# EAGLE board 01 Raspberry Hat 6 Schematic (EAGLE 8.5.2)
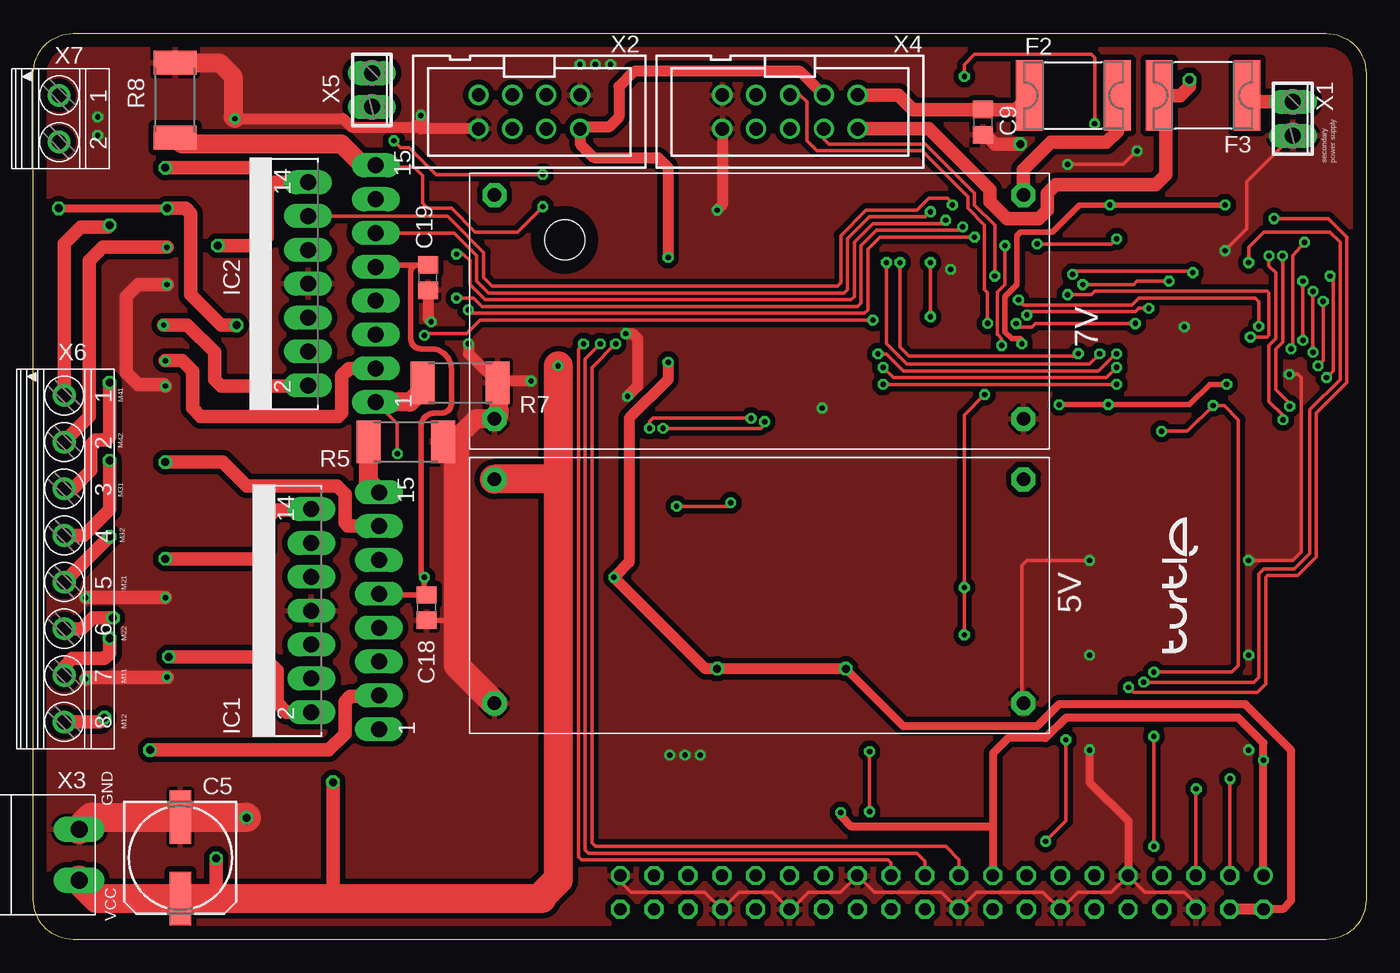
[diagram p0: board, top side]
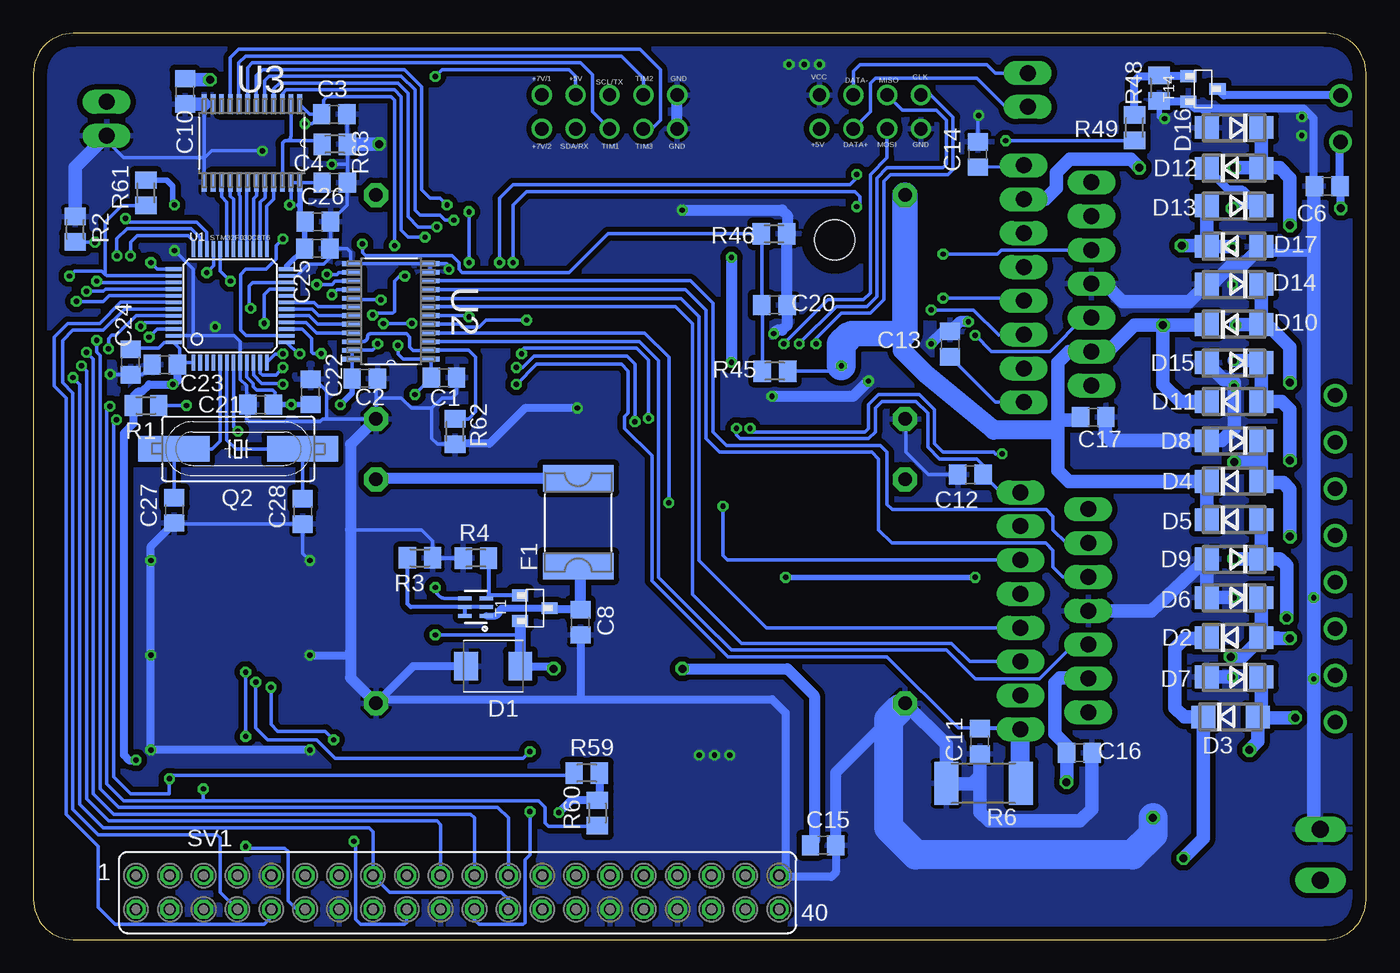
[diagram p1: board, bottom side, seen from below]

Size 100 x 68 mm. Coordinates in mm from the lower left corner, seen from the top.
Outline: 0,65 arc-90 3,68 97,68 arc-90 100,65 100,3 arc-90 97,0 3,0 arc-90 0,3 0,65
Copper layers (1*16): Top 0.035mm / dielectric 1.5mm / Bottom 0.035mm
Design rules "default *": minimum track width 10mil, minimum drill 0.4mm, track to track 8mil, track to pad 8mil, pad to pad 8mil, via to via 8mil, smd to smd 8mil, copper to edge 40mil, drill to drill 8mil, minimum pad ring 10mil, minimum via ring 8mil, stop-mask expansion 4mil, vias tented up to drill 0mil, thermal gap 10mil
Holes 3 mm at 39.87,52.5

## Footprints (pad centres in the part's own frame; a part is rotated, then mirrored left to right if it is on the bottom)
C0805 = smd 1.3 x 1.5: 1 -0.95,0; 2 0.95,0
153CLV-0807 = smd 4 x 1.6: + 3.05,0; - -3.05,0
SMBJ = smd 1.78 x 2.16: A 2.04,0; C -2.03,0
DO214AC = smd 1.8 x 1.7: A 2.05,0; C -2.05,0
2920L = smd 2 x 5.3: 1 -3.3,0; 2 3.3,0
MULTIWATT-15 = drill 1.2 long: 1 -8.89,-7.62; 2 -7.62,-2.54; 3 -6.35,-7.62; 4 -5.08,-2.54; 5 -3.81,-7.62; 6 -2.54,-2.54; 7 -1.27,-7.62; 8 0,-2.54; 9 1.27,-7.62; 10 2.54,-2.54; 11 3.81,-7.62; 12 5.08,-2.54; 13 6.35,-7.62; 14 7.62,-2.54; 15 8.89,-7.62
HC49UP = smd 5.334 x 1.93: 1 -4.826,0; 2 4.826,0
M0805 = smd 1.3 x 1.6: 1 -0.95,0; 2 0.95,0
R2512 = smd 1.8 x 3.2: 1 -2.8,0; 2 2.8,0
FE20-2 = drill 0.914: 1 -24.13,1.27 | drill 0.914 octagon: 2 -24.13,-1.27; 3 -21.59,1.27; 4 -21.59,-1.27; 5 -19.05,1.27; 6 -19.05,-1.27; 7 -16.51,1.27; 8 -16.51,-1.27; 9 -13.97,1.27; 10 -13.97,-1.27; 11 -11.43,1.27; 12 -11.43,-1.27; 13 -8.89,1.27; 14 -8.89,-1.27; 15 -6.35,1.27; 16 -6.35,-1.27; 17 -3.81,1.27; 18 -3.81,-1.27; 19 -1.27,1.27; 20 -1.27,-1.27; 21 1.27,1.27; 22 1.27,-1.27; 23 3.81,1.27; 24 3.81,-1.27; 25 6.35,1.27; 26 6.35,-1.27; 27 8.89,1.27; 28 8.89,-1.27; 29 11.43,1.27; 30 11.43,-1.27; 31 13.97,1.27; 32 13.97,-1.27; 33 16.51,1.27; 34 16.51,-1.27; 35 19.05,1.27; 36 19.05,-1.27; 37 21.59,1.27; 38 21.59,-1.27; 39 24.13,1.27; 40 24.13,-1.27
SOT23 = smd 1.3 x 0.9: 1 -1.1,0.95; 2 -1.1,-0.95; 3 1.1,0
LQFP48 = smd 0.28 x 1.2: 1 -2.75,-4.25; 2 -2.25,-4.25; 3 -1.75,-4.25; 4 -1.25,-4.25; 5 -0.75,-4.25; 6 -0.25,-4.25; 7 0.25,-4.25; 8 0.75,-4.25; 9 1.25,-4.25; 10 1.75,-4.25; 11 2.25,-4.25; 12 2.75,-4.25; 25 2.75,4.25; 26 2.25,4.25; 27 1.75,4.25; 28 1.25,4.25; 29 0.75,4.25; 30 0.25,4.25; 31 -0.25,4.25; 32 -0.75,4.25; 33 -1.25,4.25; 34 -1.75,4.25; 35 -2.25,4.25; 36 -2.75,4.25 | smd 1.2 x 0.28: 13 4.25,-2.75; 14 4.25,-2.25; 15 4.25,-1.75; 16 4.25,-1.25; 17 4.25,-0.75; 18 4.25,-0.25; 19 4.25,0.25; 20 4.25,0.75; 21 4.25,1.25; 22 4.25,1.75; 23 4.25,2.25; 24 4.25,2.75; 37 -4.25,2.75; 38 -4.25,2.25; 39 -4.25,1.75; 40 -4.25,1.25; 41 -4.25,0.75; 42 -4.25,0.25; 43 -4.25,-0.25; 44 -4.25,-0.75; 45 -4.25,-1.25; 46 -4.25,-1.75; 47 -4.25,-2.25; 48 -4.25,-2.75
SOP65P640X120-24N = smd 1.473 x 0.356: 1 -2.921,3.581; 2 -2.921,2.921; 3 -2.921,2.286; 4 -2.921,1.626; 5 -2.921,0.965; 6 -2.921,0.33; 7 -2.921,-0.33; 8 -2.921,-0.965; 9 -2.921,-1.626; 10 -2.921,-2.286; 11 -2.921,-2.921; 12 -2.921,-3.581; 13 2.921,-3.581; 14 2.921,-2.921; 15 2.921,-2.286; 16 2.921,-1.626; 17 2.921,-0.965; 18 2.921,-0.33; 19 2.921,0.33; 20 2.921,0.965; 21 2.921,1.626; 22 2.921,2.286; 23 2.921,2.921; 24 2.921,3.581
LM2596_CONVERTER = drill 1 pad 1.8 octagon: +5V 1.65,41.55; GND 18.45,1.85; GND1 18.45,41.55; IN+ 1.65,1.85
SOT363 = smd 0.3 x 0.99: 1 -0.65,-0.8; 2 0,-0.8; 3 0.65,-0.8; 4 0.65,0.81; 5 0,0.81; 6 -0.65,0.81
2POL254 = drill 1.2 long: 1 -1.27,0; 2 1.27,0
PAK100/2500-10 = drill 1 pad 1.422: 1 -3.81,-1.27; 2 -3.81,1.27; 3 -1.27,-1.27; 4 -1.27,1.27; 5 1.27,-1.27; 6 1.27,1.27; 7 3.81,-1.27; 8 3.81,1.27
MC2 = drill 1.27 long: 1 -1.905,0; 2 1.905,0
PAK100/2500-10' = drill 1 pad 1.422: 1 -5.08,-1.27; 2 -5.08,1.27; 3 -2.54,-1.27; 4 -2.54,1.27; 5 0,-1.27; 6 0,1.27; 7 2.54,-1.27; 8 2.54,1.27; 9 5.08,-1.27; 10 5.08,1.27
1751303 = drill 1.1 pad 1.7: 1 -12.25,-0.1; 2 -8.75,-0.1; 3 -5.25,-0.1; 4 -1.75,-0.1; 5 1.75,-0.1; 6 5.25,-0.1; 7 8.75,-0.1; 8 12.25,-0.1
1751248 = drill 1.1 pad 1.7: 1 -1.75,-0.1; 2 1.75,-0.1

## Placement (x,y rotation side)
C1  100n  [C0805]  69.2,42.16 0 bottom
C2  100n  [C0805]  75.13,42.11 0 bottom
C3  100n  [C0805]  77.42,61.93 0 bottom
C4  100n  [C0805]  77.38,56.81 0 bottom
C5  100u  [153CLV-0807]  11.03,6.13 270 top
C6  4u7  [C0805]  2.92,56.52 180 bottom
C8  100n  [C0805]  58.95,23.81 270 bottom
C9  100n  [C0805]  71.24,61.33 270 top
C10  100n  [C0805]  88.62,63.64 270 bottom
C11  100n  [C0805]  28.99,14.88 270 bottom
C12  100n  [C0805]  29.7,34.89 180 bottom
C13  100n  [C0805]  31.22,44.68 90 bottom
C14  100n  [C0805]  29.14,58.91 90 bottom
C15  100n  [C0805]  40.74,7.07 0 bottom
C16  100n  [C0805]  21.52,14.01 0 bottom
C17  100n  [C0805]  20.48,39.19 0 bottom
C18  100n  [C0805]  29.5,24.9 90 top
C19  100n  [C0805]  29.6,49.67 90 top
C20  47u  [C0805]  44.4,47.62 0 bottom
C21  100n  [C0805]  82.94,40.14 180 bottom
C22  1u  [C0805]  79.21,41.09 90 bottom
C23  100n  [C0805]  90.13,43.14 180 bottom
C24  100n  [C0805]  92.71,43.34 270 bottom
C25  100n  [C0805]  78.7,51.86 0 bottom
C26  4u7  [C0805]  78.66,53.86 0 bottom
C27  20p  [C0805]  89.42,32.21 90 bottom
C28  20p  [C0805]  79.78,32.12 90 bottom
D1  SMBJ5.0A-TR  [SMBJ]  65.49,20.51 180 bottom
D2  SK38SMA  [DO214AC]  9.91,22.64 0 bottom
D3  SK38SMA  [DO214AC]  10.16,16.7 0 bottom
D4  SK38SMA  [DO214AC]  9.91,34.37 0 bottom
D5  SK38SMA  [DO214AC]  9.91,31.49 0 bottom
D6  SK38SMA  [DO214AC]  9.91,25.65 180 bottom
D7  SK38SMA  [DO214AC]  9.91,19.71 180 bottom
D8  SK38SMA  [DO214AC]  9.91,37.43 180 bottom
D9  SK38SMA  [DO214AC]  9.91,28.56 180 bottom
D10  SK38SMA  [DO214AC]  9.91,46.15 0 bottom
D11  SK38SMA  [DO214AC]  9.91,40.36 0 bottom
D12  SK38SMA  [DO214AC]  9.91,57.87 0 bottom
D13  SK38SMA  [DO214AC]  9.91,55.07 180 bottom
D14  SK38SMA  [DO214AC]  9.91,49.18 180 bottom
D15  SK38SMA  [DO214AC]  9.91,43.29 180 bottom
D16  SK38SMA  [DO214AC]  9.91,60.93 180 bottom
D17  SK38SMA  [DO214AC]  9.91,52.01 0 bottom
F1  SL125-33  [2920L]  59.12,31.31 90 bottom
F2  SL125-33  [2920L]  78.03,63.33 0 top
F3  SL125-33  [2920L]  87.77,63.33 180 top
IC1  L298  [MULTIWATT-15]  18.32,24.67 90 top
IC2  L298  [MULTIWATT-15]  18.07,49.2 90 top
Q2  8 MHz  [HC49UP]  84.63,36.82 180 bottom
R1  10k  [M0805]  91.54,40.07 180 bottom
R2  10k  [M0805]  96.85,53.3 270 bottom
R3  10k 1%  [M0805]  70.99,28.64 180 bottom
R4  10k 1%  [M0805]  66.8,28.62 0 bottom
R5  0R25  [R2512]  27.94,37.35 0 top
R6  0R25  [R2512]  28.7,11.71 180 bottom
R7  0R25  [R2512]  32.02,41.78 0 top
R8  0R25  [R2512]  10.64,62.98 90 top
R45  10k  [M0805]  44.36,42.65 0 bottom
R46  1k  [M0805]  44.43,52.96 180 bottom
R48  100k  [M0805]  15.53,63.89 90 bottom
R49  100  [M0805]  17.38,60.92 270 bottom
R59  4k7  [M0805]  58.48,12.49 0 bottom
R60  4k7  [M0805]  57.68,9.49 90 bottom
R61  10k  [M0805]  91.56,56.04 90 bottom
R62  10k  [M0805]  68.36,38.12 270 bottom
R63  10k  [M0805]  77.38,59.67 0 bottom
SV1  [FE20-2]  68.17,3.53 0 bottom
T1  [SOT23]  62.38,24.86 0 bottom
T14  BSS306N  [SOT23]  12.25,63.83 0 bottom
U1  STM32F051C8T  [LQFP48]  85.23,47.56 0 bottom
U2  SN74LVC4245APWR  [SOP65P640X120-24N]  73.16,47.14 180 bottom
U3  SN74LVC4245APWR  [SOP65P640X120-24N]  83.59,59.76 270 bottom
U$2  LM2596_CONVERTER  [LM2596_CONVERTER]  32.74,36.18 270 top
U$3  BCM857BS  [SOT363]  66.81,24.94 90 bottom
U$4  LM2596_CONVERTER  [LM2596_CONVERTER]  32.74,57.52 270 top
X1  [2POL254]  94.49,61.58 270 top
X2  2508-  [PAK100/2500-10]  37.21,62.1 180 top
X3  MC2  [MC2]  3.43,6.35 270 top
X4  2510-  [PAK100/2500-10']  56.77,62.1 180 top
X5  [2POL254]  25.4,63.75 270 top
X6  1751303  [1751303]  2.41,28.57 270 top
X7  1751248  [1751248]  2.03,61.59 270 top

## Library data of the parts
C1-C4 C6 C8-C19 C21-C28 R1-R4 R45 R46 R48 R49 R59-R63 = resistor
C5 = resistor; LINK: http://www.tme.eu/pl/details/sc1e107m0806bvr/kondensatory-elektrolityczne-smd-85c/samwha/
C20 = resistor; LINK: http://www.tme.eu/pl/details/cl21a476mqynnng/kondensatory-mlcc-smd-0805/samsung/
D1 = diode; LINK: http://www.tme.eu/pl/details/smbj5.0a-tr/diody-transil-smd-jednokierunkowe/st-microelectronics/
D2-D17 = diode; LINK: http://www.tme.eu/pl/details/sk38sma-dio/diody-schottky-smd/diotec-semiconductor/sk38sma/
F1 = polyfuse-smd_10; LINK: http://www.tme.eu/pl/details/sl125-33/bezpieczniki-polimerowe-smd/ece/; MF: Littelfuse; MPN: 2920L050; OC_FARNELL: 1822223; OC_NEWARK: 18M4790
F2 F3 = polyfuse-smd_10; LINK: http://www.tme.eu/pl/details/sl075-33/bezpieczniki-polimerowe-smd/ece/; MF: Littelfuse; MPN: 2920L050; OC_FARNELL: 1822223; OC_NEWARK: 18M4790
IC1 IC2 = st-microelectronics; MPN: L298N; OC_FARNELL: 1589425; OC_NEWARK: 32M1527
Q2 = crystal; LINK: YIC 49SLMT 8.00MHZ 20PF 30PPM; OC_FARNELL: unknown; OC_NEWARK: unknown
R5-R8 = rcl; LINK: http://www.tme.eu/pl/details/cs2512-0r25-1%25-hp/rezystory-smd-2512/viking/cs12ftfsr250/
SV1 = con-lsta; OC_FARNELL: unknown; OC_NEWARK: unknown
T1 = we-transistor; LINK: http://www.tme.eu/pl/details/dmp2305u-7/tranzystory-z-kanalem-p-smd/diodes-incorporated/
T14 = we-transistor
U1 = STM32F030; FLASH: 64K
U2 U3 = Texas Instruments_By_element14_Batch_1; MPN: SN74LVC4245APWR; OC_FARNELL: 1470935; OC_NEWARK: 92B8894; PACKAGE: TSSOP-24; SUPPLIER: Texas Instruments
U$2 U$4 = Voltage Converter
U$3 = BCM857BS; LINK: http://www.tme.eu/pl/details/bcm857bs/tranzystory-pnp-smd/nxp/
X1 X5 = con-phoenix-254; OC_FARNELL: unknown; OC_NEWARK: unknown
X2 = Simplex-Connectors; MF: 3M; MPN: 2510-6002UB; OC_FARNELL: 9838244; OC_NEWARK: 46F4725
X3 = con-phoenix-381_l
X4 = con-3m; MF: 3M; MPN: 2510-6002UB; OC_FARNELL: 9838244; OC_NEWARK: 46F4725
X6 X7 = con-phoenix-350; OC_FARNELL: unknown; OC_NEWARK: unknown

## Nets
+3V3: C2.1 C4.1 C21.1 C22.1 C23.1 C24.1 C25.1 C26.1 R1.2 R59.2 R60.2 R61.2 SV1.1 SV1.17 U1.1 U1.9 U1.24 U1.48 U2.23 U2.24 U3.23 U3.24
+5V: C1.1 C3.1 C15.1 C18.2 C19.2 D1.C IC1.9 IC2.9 SV1.2 SV1.4 T1.2 U2.1 U3.1 U$3.4 X2.2 X4.3
+7V/1: C9.1 F2.1 X4.1
+7V/2: C10.1 F3.2 X4.2
BAT_MEAS: C20.1 R45.1 R46.2 U1.14
BOOT0: R2.2 U1.44
DATA+: X2.4 X5.2
DATA-: X2.3 X5.1
EN1: IC1.6 U2.3
EN1_UC: U1.16 U2.21
EN2: IC1.11 U2.4
EN2_UC: U1.17 U2.20
EN3: IC2.6 U2.5
EN3_UC: U1.18 U2.19
EN4: IC2.11 U2.6
EN4_UC: U1.19 U2.18
GND: C1.2 C2.2 C3.2 C4.2 C5.- C6.2 C8.2 C9.2 C10.2 C11.2 C12.2 C13.2 C14.2 C15.2 C16.2 C17.2 C18.1 C19.1 C20.2 C21.2 C22.2 C23.2 C24.2 C25.2 C26.2 C27.1 C28.1 D1.A D6.A D7.A D8.A D9.A D14.A D15.A D16.A D17.A IC1.8 IC2.8 R2.1 R3.1 R4.1 R5.2 R6.2 R7.2 R8.2 R46.1 R48.1 R62.2 R63.2 SV1.6 SV1.9 SV1.14 SV1.20 SV1.25 SV1.30 SV1.34 SV1.39 T14.2 U1.8 U1.23 U1.47 U2.11 U2.12 U2.13 U3.11 U3.12 U3.13 U$2.GND U$2.GND1 U$4.GND U$4.GND1 X1.2 X2.1 X2.8 X3.1 X4.9 X4.10
IN11: IC1.5 U2.7
IN11_UC: U1.45 U2.17
IN12: IC1.7 U2.8
IN12_UC: U1.46 U2.16
IN21: IC1.10 U2.9
IN21_UC: U1.32 U2.15
IN22: IC1.12 U2.10
IN22_UC: U1.33 U2.14
IN31: IC2.5 U3.3
IN31_UC: U1.25 U3.21
IN32: IC2.7 U3.4
IN32_UC: U1.26 U3.20
IN41: IC2.10 U3.5
IN41_UC: U1.27 U3.19
IN42: IC2.12 U3.6
IN42_UC: U1.28 U3.18
LED: R49.2 U1.15
MOT11: D2.A D6.C IC1.2 X6.7
MOT12: D3.A D7.C IC1.3 X6.8
MOT21: D4.A D8.C IC1.13 X6.5
MOT22: D5.A D9.C IC1.14 X6.6
MOT31: D10.A D14.C IC2.2 X6.3
MOT32: D11.A D15.C IC2.3 X6.4
MOT41: D12.A D16.C IC2.13 X6.1
MOT42: D13.A D17.C IC2.14 X6.2
N$1: R62.1 U2.2 U2.22
N$2: R63.1 U3.2 U3.22
N$3: F1.2 U$2.+5V
N$4: C8.1 F1.1 T1.3 U$3.1
N$5: F3.1 X1.1
N$6: R4.2 T1.1 U$3.3
N$8: R3.2 U$3.2 U$3.5 U$3.6
N$10: F2.2 U$4.+5V
N$21: R48.2 R49.1 T14.1
N$24: T14.3 X7.1
N$28: C28.2 Q2.1 U1.6
N$29: C27.2 Q2.2 U1.5
NRST: R1.1 SV1.12 U1.7
RPI_CLK: SV1.23 U1.39 X2.7
RPI_MISO: SV1.21 U1.40 X2.5
RPI_MOSI: SV1.19 U1.41 X2.6
RPI_RXD: SV1.10 U1.42
RPI_TXD: SV1.8 U1.43
SCL: R60.1 SV1.5 U1.35
SCL_TX: U1.21 X4.5
SDA: R59.1 SV1.3 U1.36
SDA_RX: U1.22 X4.4
SEN1: C11.1 IC1.1 R6.1 U1.10
SEN2: C12.1 IC1.15 R5.1 U1.11
SEN3: C13.1 IC2.1 R7.1 U1.12
SEN4: C14.1 IC2.15 R8.1 U1.13
SERVO1: U3.7 X4.6
SERVO1_UC: U1.29 U3.17
SERVO2: U3.8 X4.7
SERVO2_UC: U1.30 U3.16
SERVO3: U3.9 X4.8
SERVO3_UC: U1.31 U3.15
SPI1_NSS: R61.1 SV1.15 SV1.24 U1.38
SWCLK: SV1.22 U1.37
SWDIO: SV1.18 U1.34
VCC: C5.+ C6.1 C16.1 C17.1 D2.C D3.C D4.C D5.C D10.C D11.C D12.C D13.C IC1.4 IC2.4 R45.2 U$2.IN+ U$4.IN+ X3.2 X7.2

## Tracks (layer width: path | path; a pad name or v marks a point on that pad's centre or on a via)
+3V3  (via drill 0.4)
  Top 0.406: v89.41,55.12 v80.77,55.12 78.49,55.12 76.45,53.09 74.04,53.09 73.79,52.83 73.79,49.15 72.9,48.26 72.9,45.59 73.41,45.09 74.04,45.09 74.3,44.83 v74.17,44.7 | v89.53,41.66 88.27,41.66 86.74,40.13 v80.64,40.13 | v80.65,40.14 v80.64,40.13 | v80.64,40.13 v76.96,40.13
  Top 0.61: SV1.17 72.01,4.83 72.01,8.38 | SV1.1 v92.3,13.46 92.3,14.76 90.42,16.64 77.47,16.64 75.95,15.11 73.15,15.11 72.01,13.97 72.01,8.38 | v60.58,9.53 60.58,9.27 61.34,8.51 71.88,8.51 72.01,8.38
  Bottom 0.254: C24.1 92.55,44.4 90.6,44.4 90.19,44.81 U1.48 89.01,44.34 89.01,43.31 | 89.48,43.04 C23.1 89.01,43.31 | U1.1 89.01,43.31 | 79.71,51.8 C25.1 | C2.1 U2.24 U2.23 74.55,44.21 74.3,44.47 v74.17,44.7 | 79.98,56.81 U3.24 | U1.9 83.98,42.2 83.49,41.71 83.49,41.48 83.24,41.22 82.04,41.22 81.86,41.04 C21.1 82.04,40.32 | v80.77,55.12 80.67,55.22 U3.23 80.64,56.81 79.98,56.81 | 79.98,56.81 C4.1
  Bottom 0.305: 80.98,50.53 U1.24
  Bottom 0.406: 80.98,50.53 C25.1 79.65,53.82 C26.1 79.98,54.23 79.98,55.24 | 79.98,56.81 79.98,55.24 | R61.2 90.01,56.99 89.53,56.52 89.53,55.24 v89.41,55.12 | 80.11,55.12 79.98,55.24 | C21.1 v80.65,40.14 | v80.65,40.14 v80.64,40.13 | v89.53,41.66 89.15,42.04 | v76.96,40.13 76.08,41.01 C2.1 | C22.1 v80.65,40.14
  Bottom 0.61: 60.55,9.55 v60.58,9.53 59.66,10.44 R60.2 | v92.3,13.46 92.84,13.46 93.22,13.84 93.22,37.97 92.49,38.7 R1.2 92.49,40.73 92.08,41.15 91.82,41.15 91.31,41.66 v89.53,41.66 89.41,41.66 89.15,41.91 89.15,42.04 89.15,43.11 C23.1 | 57.65,10.41 R60.2 | R59.2 57.53,10.59 R60.2
+5V  (via drill 0.4, 0.6)
  Top 0.254: 29.42,25.94 C18.2 | v69.85,22.86 v69.85,26.42 69.85,39.37 v71.37,40.89 | v72.64,44.58 72.64,45.09 72.39,45.34 72.33,45.4 72.33,48.58 72.9,49.15 v72.9,52.07 | v69.85,64.77 69.85,65.66 70.61,66.42 79.38,66.42 79.63,66.17 v79.63,61.21
  Top 0.406: IC2.9 25.83,50.62 28.83,50.62 | 28.83,50.62 C19.2 | IC1.9 26.02,25.85 C18.2 29.34,26.02 v29.34,27.18 29.08,27.43 29.08,38.48 arc-90 30.1,39.5 30.61,39.5 arc90 31.37,40.26 31.37,42.8 arc90 29.84,44.32 29.08,44.32 arc-90 28.32,45.09 28.32,50.11 arc-90 28.83,50.62
  Top 0.61: SV1.2 92.32,2.29 93.73,2.29 94.36,2.92 94.36,14.22 90.93,17.65 76.96,17.65 75.31,16 65.28,16 v60.96,20.32
  Top 0.813: SV1.2 SV1.4 | v60.96,20.32 v51.31,20.32 50.42,20.32 v43.56,27.18 44.7,28.32 44.7,39.12 47.62,42.04 v47.62,43.31 | v47.62,51.18 47.62,57.91 46.86,58.67 42.04,58.67 41.02,59.69 X2.2 41.15,60.96 43.18,60.96 43.94,61.72 43.94,64.01 45.09,65.15 57.53,65.15 X4.3
  Bottom 0.254: U$3.4 69.02,25.59 arc90 v69.85,26.42 | v69.85,22.86 63.73,22.86 arc90 63.48,22.61 | v71.37,40.89 71.37,40.93 C1.1 70.15,43.47 U2.1 72.26,43.56 72.64,43.94 v72.64,44.58 | v72.9,52.07 72.9,62.99 73.15,63.25 77.98,63.25 78.23,62.99 78.23,62.07 C3.1 | C3.1 79.26,61.93 U3.1 | v69.85,64.77 69.34,65.28 59.82,65.28 59.31,64.77 59.31,63.5 | v79.63,61.21 79.08,61.21 C3.1
  Bottom 0.406: v29.34,27.18 v43.56,27.18
  Bottom 0.61: D1.C 61.15,20.51 v60.96,20.32
  Bottom 0.813: T1.2 63.48,22.61 63.48,20.52 D1.C | v51.31,20.32 43.43,20.32 41.4,18.29 41.4,7.36 C15.1 | v47.62,51.18 v47.62,43.31
+7V/1
  Top 1.016: F2.1 73.67,62.28 C9.1 65.99,62.28 64.9,63.37 X4.1
+7V/2  (via drill 0.6)
  Top 1.016: v86.74,64.52 86.74,64.01 86.07,63.33 F3.2 84.96,62.84 84.96,57.4 84.2,56.64 76.71,56.64 76.07,56.01 76.07,54.74 75.44,54.1 73.03,54.1 71.75,55.37 71.75,56.26 67.18,60.83 X4.2
  Bottom 1.016: v86.74,64.52 88.55,64.52 C10.1
BAT_MEAS  (via drill 0.4)
  Top 0.254: v75.31,52.2 80.9,52.2 v81.28,52.58
  Bottom 0.254: v81.28,52.58 81.79,52.07 81.79,51.05 82.55,50.29 84.07,50.29 84.45,49.91 84.45,45.72 84.04,45.31 U1.14 | v75.31,52.2 75.31,51.56 75.06,51.31 68.58,51.31 68.07,50.8 68.07,50.29 67.82,50.04 59.82,50.04 56.9,52.96 R46.2 45.35,52.93 C20.1 45.31,47.58 R45.1
BOOT0  (via drill 0.4)
  Top 0.254: v95.38,52.32 94.49,51.31 94.49,44.45 v94.36,44.32
  Bottom 0.254: v95.38,52.32 96.82,52.32 arc90 R2.2 | U1.44 92.3,46.81 93.77,45.34 94.11,45.34 94.36,45.09 v94.36,44.32
DATA+
  Bottom 0.254: X5.2 27.05,62.48 29.21,64.64 36.83,64.64 37.21,64.26 37.21,62.1 X2.4
DATA-
  Bottom 0.254: X5.1 27.81,65.02 28.45,65.66 37.97,65.66 38.48,65.15 X2.3
EN1
  Bottom 0.254: IC1.6 21.94,22.13 24.51,19.56 29.34,19.56 31.5,21.72 47.62,21.72 49.78,23.88 50.04,24.13 53.09,27.18 53.09,43.43 54.51,44.86 U2.3
EN1_UC
  Bottom 0.254: U1.16 79.54,46.31 78.76,45.52 U2.21
EN2  (via drill 0.4)
  Top 0.254: v48.26,32.51 52.07,32.51 v52.32,32.77
  Bottom 0.254: v52.32,32.77 52.32,43.69 54.15,45.52 U2.4 | IC1.11 47.91,28.48 48.26,28.83 v48.26,32.51
EN2_UC
  Bottom 0.254: U1.17 79.31,46.81 78.68,46.18 U2.20 | U2.20
EN3  (via drill 0.4)
  Top 0.254: v62.99,46.48 33.53,46.48 32.51,45.47 29.46,45.47 v29.34,45.34
  Bottom 0.254: U2.5 68.02,46.18 67.82,45.97 66.55,45.97 66.04,46.48 v62.99,46.48 | IC2.6 21.2,46.66 23.75,44.12 28.12,44.12 v29.34,45.34
EN3_UC
  Bottom 0.254: U1.18 79.09,47.31 78.61,46.82 U2.19
EN4  (via drill 0.4)
  Top 0.254: v67.31,46.74 v67.31,50.8 | IC2.11 31.57,53.02 33.27,51.31 33.27,49.4 34.16,48.51 60.83,48.51 61.09,48.77 61.09,52.58 62.74,54.23 66.93,54.23 v67.31,54.61
  Bottom 0.254: U2.6 67.39,46.81 v67.31,46.74 | v67.31,54.61 v67.31,50.8
EN4_UC
  Bottom 0.254: U1.19 78.92,47.81 78.61,47.5 76.11,47.5 U2.18
GND  (via drill 0.4, 0.6)
  Top 0.254: 31.42,27.51 31.75,27.18 | SV1.6 87.22,2.7 86.36,3.56 83.38,3.56 SV1.9 80.89,3.56 78.36,3.56 SV1.14 75.76,3.56 70.74,3.56 SV1.20 68.14,3.56 63.12,3.56 61.88,4.8 SV1.25 60.57,3.56 58.17,3.56 56.87,2.26 SV1.30 55.44,3.56 52.96,3.56 SV1.34 50.36,3.56 44.83,3.56 44.04,4.35 SV1.39 | v79.25,28.45 74.55,28.45 74.17,28.07 74.17,17.85 U$2.GND1 | v94.23,42.42 94.87,42.42 95.12,42.16 95.12,29.08 94.49,28.45 v91.19,28.45 | v89.41,51.69 91.06,53.34 91.06,56.88 X1.2 | v77.6,58.17 81.79,58.17 v82.8,59.18
  Top 0.406: C18.1 31.57,23.95 31.75,24.13 | 34.94,41.91 R7.2
  Top 0.61: v79.25,14.22 79.25,11.81 82.17,8.89 82.17,4.83 SV1.9
  Top 0.813: X2.8 29.08,60.83 29.08,61.34 | v29.08,61.85 29.08,61.34 | C19.1 29.6,46.6 v29.84,46.35 | v32.64,44.7 32.64,43.97 R7.2 | v44.45,45.47 44.96,45.47 45.34,45.09 45.34,41.53 v44.58,40.77 | v37.34,41.91 34.94,41.91 | X4.10 51.69,55.12 v51.31,54.74 | v15.11,61.59 23.24,61.59 23.88,60.96 28.7,60.96 29.08,61.34
  Top 1.016: v10.03,49.15 7.87,49.15 6.99,48.26 6.99,42.55 7.87,41.66 9.78,41.66 v9.91,41.53 | v9.91,25.65 v3.94,25.65 | v10.03,19.68 4.06,19.68 v3.94,19.56 | C9.2 71.45,60.38 72.14,59.69 v74.04,59.69
  Top 1.422: R7.2 34.95,39.42 U$4.GND 33.21,39.07 31.5,37.35 | R5.2 31.37,37.35 | 31.37,37.35 31.5,37.35 | 31.5,37.35 31.99,37.35 | R8.2 13.97,65.78 14.99,64.77 14.99,61.72 v15.11,61.59 | 31.75,37.34 31.38,37.34 31.37,37.35
  Top 1.93: 31.75,37.34 31.75,27.18 31.75,24.13 31.75,20.57 U$2.GND
  Top 2.184: X3.1 4.36,9.18 C5.- 15.96,9.18 v16,9.14
  Bottom 0.254: 84,40.58 C21.2 | C25.2 76.46,51.86 76.2,51.6 76.2,50.84 U2.13 U2.12 | U1.23 80.19,49.81 79.33,50.67 78.23,50.67 77.75,51.16 C25.2 | 77.8,51.81 C25.2 | C25.2 77.71,51.9 C26.2 76.45,55.12 76.45,56.79 C4.2 76.43,58.17 | 84,40.58 84,39.04 83.82,38.86 78.49,38.86 78.28,39.07 77.98,39.07 | C22.2 79.07,41.66 78.49,41.66 77.98,41.15 77.98,39.07 | 84,40.58 84,41.55 84.48,42.03 U1.8 84.48,44.85 84.93,45.31 88.01,45.31 | 87.17,58.62 U3.12 U3.11 | 76.43,58.17 R63.2 76.47,59.7 C3.2 | 77.98,39.07 U$4.GND1 74.29,40.64 | 74.29,40.64 74.29,42 C2.2 | C1.2 68.25,40.97 68.58,40.64 69.34,40.64 70.1,39.88 | R62.2 69.68,37.17 70.1,37.59 70.1,39.88 | U2.12 U2.11 | C23.2 91.83,42.39 C24.2 94.2,42.39 v94.23,42.42 | U1.47 88.01,45.31 | C27.1 89.33,31.17 C28.1 79.78,28.98 v79.25,28.45 | R3.1 70.04,29.91 70.87,30.73 76.2,30.73 | 74.29,40.64 72.39,40.64 71.63,39.88 70.1,39.88 | U3.13 87.17,58.55 | 87.17,58.55 87.17,58.62 | 87.17,58.62 86.61,59.18 v82.8,59.18 | U2.12 69.01,50.72 68.83,50.55 v68.83,50.29 | X1.2 94.49,59.95 93.22,58.67 87.3,58.67 87.17,58.55 | v89.41,51.69 88.01,50.29 88.01,45.31 | 43.48,47.65 C20.2 | 76.43,58.17 v77.6,58.17 | C12.2 32.86,34.89 34.54,36.58 34.54,39.02 U$4.GND | 43.48,51.18 R46.1 43.43,53 | C14.2 29.14,61.8 v29.08,61.85 | 44.01,4.83 SV1.39 43.94,4.7
  Bottom 0.305: R3.1 67.77,28.64 R4.1
  Bottom 0.406: R48.1 15.53,61.76 v15.11,61.59 | C13.2 31.71,45.63
  Bottom 0.61: C27.1 91.19,29.5 v91.19,28.45 v91.19,21.34 v91.19,14.22 v79.25,14.22 | v79.25,21.34 76.45,21.34 76.2,21.59 | D1.A 71.52,20.51 U$2.GND1 73.99,18.03 59.05,18.03 | C8.2 58.95,18.14 59.05,18.03 | v59.18,39.88 63.12,39.88 65.79,37.21 68.32,37.21 R62.2 | D17.A 7.42,51.56 3.94,51.56 | C6.2 3.94,56.45 3.94,61.59 4.7,62.36 12.32,62.36 | R48.1 15.47,62.88 T14.2 12.82,62.36 12.32,62.36 | D16.A 11.96,62 12.32,62.36 | 59.05,18.03 44.58,18.03 43.56,17.02 43.56,5.21 44.07,4.7 | C15.2 39.79,5.04 40.13,4.7 43.94,4.7
  Bottom 0.813: C15.2 39.79,12.53 34.99,17.33 U$2.GND | U$2.GND1 76.2,19.64 76.2,21.59 76.2,30.73 76.2,37.16 U$4.GND1 | R46.1 43.48,47.65 | X4.10 X4.9 | C20.2 43.45,46.09 43.81,45.72 44.2,45.72 v44.45,45.47 | v44.58,40.77 38.48,40.77 v37.34,41.91 | v29.84,46.35 30.5,46.35 C13.2 | 31.71,45.63 v32.64,44.7 | v51.31,54.74 43.81,54.74 43.43,54.36 43.43,53
  Bottom 1.016: D17.A 9.2,50.67 10.03,50.67 11.53,49.18 D14.A 13.26,47.88 18.29,47.88 19.61,49.2 IC2.8 | D15.A 10.71,42.04 10.16,42.04 9.91,41.78 v9.91,41.53 9.91,38.35 10.83,37.43 D8.A 19.14,37.43 19.56,37.85 19.56,39.16 C17.2 19.44,39.1 | 20.95,24.64 16.14,24.64 D9.A D6.A v9.91,25.65 | D7.A 10.06,19.71 v10.03,19.68 | U$2.GND 31.5,14.65 R6.2 31.48,11.68 29.59,11.68 28.99,12.28 C11.2 28.99,9.56 28.32,8.89 21.46,8.89 20.57,9.78 C16.2 | X3.1 3.94,8.76 v3.94,19.56 v3.94,25.65 3.94,51.56 3.94,56.45 | C10.2 U3.12 | R2.1 96.85,57.96 X1.2 | v74.04,59.69 76.28,59.69 R63.2
  Bottom 2.184: v16,9.14 16,7.87 17.53,6.35 33.78,6.35 35.81,8.38 35.81,16.51 34.99,17.33
  other vias: 4.83,61.72 4.83,60.33 43.31,65.66 42.16,65.66 41.02,65.66 86.36,45.97 50.04,13.84 48.9,13.84 47.75,13.84
  pour Bottom (isolate 0.406): 0,63 0,65 arc-90 3,68 97,68 arc-90 100,65 100,3 arc-90 97,0 3,0 arc-90 0,3
  pour Top (isolate 0.406): 0,3 0,65 arc-90 3,68 97,68 arc-90 100,65 100,3 arc-90 97,0 3,0 arc-90
IN11
  Bottom 0.254: U2.7 70.21,47.5 51.82,47.5 50.55,46.23 50.55,25.91 46.86,22.23 31.11,22.23 29.75,20.86 IC1.5
IN11_UC  (via drill 0.4)
  Top 0.254: v73.91,48.01 74.3,47.62 82.42,47.62 82.93,48.13 91.69,48.13 91.95,47.88 v91.94,46.02
  Bottom 0.254: v73.91,48.01 75.98,48.01 U2.17 | U1.45 91.66,46.31 v91.94,46.02
IN12
  Bottom 0.254: U2.8 51.41,48.11 50.04,46.74 50.04,28.45 44.99,23.4 IC1.7
IN12_UC  (via drill 0.4)
  Top 0.254: v91.31,45.21 92.58,45.21 92.71,45.34 92.71,48.51 92.58,48.64 79.63,48.64 79.38,48.39 v77.6,48.39
  Bottom 0.254: U1.46 90.72,45.81 v91.31,45.21 | v77.6,48.39 77.22,48.77 U2.16 | U2.16
IN21
  Bottom 0.254: IC1.10 22.76,27.21 23.5,27.94 23.5,29.21 24.03,29.74 35.59,29.74 36.58,30.73 36.58,36.07 37.08,36.58 48.51,36.58 48.77,36.83 49.53,37.59 49.53,47.24 51.05,48.77 U2.9
IN21_UC  (via drill 0.4)
  Top 0.254: v78.74,49.15 82.55,49.15 82.8,49.4 v85.22,49.4
  Bottom 0.254: U1.32 85.98,50.16 v85.22,49.4 | U2.15 76.11,49.4 77.34,49.4 77.6,49.15 v78.74,49.15
IN22
  Bottom 0.254: IC1.12 22.51,29.75 23.5,30.73 23.5,31.75 24,32.26 35.56,32.26 35.94,32.64 35.94,36.58 36.45,37.08 48.01,37.08 49.02,38.1 49.02,47.75 50.7,49.43 U2.10
IN22_UC  (via drill 0.4)
  Top 0.254: 78.11,50.04 v77.98,49.91 78.23,50.16 86.87,50.16 v87,50.04
  Bottom 0.254: U1.33 86.48,50.55 v87,50.04 | v77.98,49.91 77.22,49.91 77.09,50.04 76.11,50.04 U2.14
IN31  (via drill 0.4)
  Top 0.254: v70.61,52.7 63.5,52.7 62.61,51.82 62.61,47.24 62.36,46.99 32.89,46.99 v32.64,47.24
  Bottom 0.254: U3.3 81.31,63.47 81.03,63.75 72.9,63.75 72.39,63.25 72.39,53.21 71.88,52.7 v70.61,52.7 | v32.64,47.24 29.46,47.24 27.56,45.34 25.74,45.34 IC2.5
IN31_UC
  Bottom 0.254: U1.25 82.48,55.04 81.96,55.56 U3.21
IN32  (via drill 0.4)
  Top 0.254: v31.75,48.13 33.02,48.13 33.66,47.5 61.85,47.5 62.1,47.75 62.1,52.07 63.25,53.21 69.47,53.21 v69.72,53.47
  Bottom 0.254: U3.4 81.97,63.83 81.53,64.26 72.64,64.26 71.88,63.5 71.88,54.23 71.12,53.47 v69.72,53.47 | v31.75,48.13 25.88,48.13 IC2.7
IN32_UC
  Bottom 0.254: U1.26 82.98,55.32 82.62,55.68 U3.20
IN41  (via drill 0.4)
  Top 0.254: v31.75,51.44 32.26,51.44 32.77,50.93 32.77,49.15 33.91,48.01 61.34,48.01 61.59,48.26 61.59,52.32 62.99,53.72 68.2,53.72 v68.45,53.98
  Bottom 0.254: U3.5 82.63,64.44 82.3,64.77 72.39,64.77 71.37,63.75 71.37,54.74 70.99,54.36 69.47,54.36 69.09,53.98 v68.45,53.98 | IC2.10 27.36,51.74 27.67,51.44 v31.75,51.44
IN41_UC
  Bottom 0.254: U1.27 83.48,55.6 83.26,55.82 U3.19
IN42  (via drill 0.4)
  Top 0.254: v68.96,55.12 68.96,55.24 68.58,55.63 67.18,55.63 66.29,54.74 62.48,54.74 60.58,52.83 60.58,49.28 60.33,49.02 34.42,49.02 33.78,49.66 33.78,51.56 31.56,53.78 31.11,54.23 31.06,54.28 IC2.12
  Bottom 0.254: U3.6 83.26,64.82 82.8,65.28 72.14,65.28 70.87,64.01 70.87,56.26 70.23,55.63 69.47,55.63 v68.96,55.12
IN42_UC
  Bottom 0.254: U1.28 83.98,56.78 U3.18
LED  (via drill 0.4)
  Top 0.254: v65.02,50.8 65.02,44.45 65.68,43.79 78.22,43.79 v78.4,43.97 | v38.23,57.4 30.23,57.4 28.19,59.44 27.56,59.44 v27.05,59.94
  Bottom 0.254: v65.02,50.8 65.02,55.63 64.01,56.64 38.73,56.64 38.23,57.15 v38.23,57.4 | U1.15 79.84,45.81 79.12,45.09 79.12,44.07 79.02,43.97 v78.4,43.97 | v27.05,59.94 17.41,59.94 R49.2
MOT11  (via drill 0.6)
  Top 1.016: v5.72,22.6 v5.71,22.61 5.71,21.46 5.33,21.08 2.92,21.08 2.31,20.47 X6.7 | IC1.2 19.02,17.05 18.29,17.78 18.29,20.19 17.27,21.21 v10.16,21.21
  Bottom 1.016: D6.C D2.A | D2.A 7.24,22.64 | 7.24,22.64 6.62,22.64 | v5.71,22.61 7.2,22.61 7.24,22.64 | v10.16,21.21 9.29,21.21 D2.A
MOT12  (via drill 0.6)
  Top 1.016: IC1.3 25.86,18.24 23.77,18.24 23.38,17.84 23.38,15.44 22.16,14.22 v8.76,14.22 | X6.8 5.02,16.32 v5.33,16.64
  Bottom 1.016: D7.C 7.86,16.95 D3.A | v5.33,16.64 8.05,16.64 D3.A | D3.A 8.12,14.87 v8.76,14.22
MOT21  (via drill 0.6)
  Top 1.016: IC1.13 25.91,31.04 23.57,31.04 23.38,31.24 23.38,33.44 22.77,34.04 15.99,34.04 14.22,35.81 v9.91,35.81 | X6.5 3.05,27.56 v5.71,30.23
  Bottom 1.016: D8.C 7.86,35.81 | 7.86,35.81 D4.A 7.78,34.29 6.22,34.29 5.71,33.78 v5.71,30.23 | v9.91,35.81 7.86,35.81
MOT22  (via drill 0.6)
  Top 1.016: IC1.14 20.82,32.24 18.18,32.24 17.38,31.44 17.38,29.31 16.64,28.57 v9.91,28.57 | X6.6 3.64,23.32 4.45,24.13 v5.97,24.13
  Bottom 1.016: D9.C D5.A | D9.C 7.4,28.56 | v9.91,28.57 7.88,28.57 D9.C | v5.97,24.13 5.97,28.07 6.48,28.57 7.84,28.57 D9.C
MOT31  (via drill 0.4, 0.6)
  Top 1.016: X6.3 2.96,33.83 4.32,35.18 4.32,37.08 4.7,37.47 5.46,37.47 5.71,37.72 v5.71,41.78 | v9.78,46.1 11.56,46.1 13.59,44.07 13.59,42.04 14.1,41.53 20.55,41.53 IC2.2
  Bottom 1.016: D14.C D10.A | D10.A 7.41,46.15 5.71,44.45 v5.71,41.78 | D10.A 9.73,46.15 v9.78,46.1
MOT32  (via drill 0.4, 0.6)
  Top 1.016: IC2.3 23.68,42.85 23.14,42.3 23.14,39.51 22.86,39.24 12.57,39.24 11.94,39.88 11.94,42.67 11.18,43.43 v9.91,43.43 | X6.4 3.78,30.32 5.71,32.26 v5.71,35.94
  Bottom 1.016: v9.91,43.43 8,43.43 D15.C D11.A 7.83,40.39 6.35,40.39 5.71,39.75 v5.71,35.94
MOT41  (via drill 0.6)
  Top 1.016: X6.1 2.31,52.22 3.56,53.47 5.59,53.47 v5.71,53.59 | v17.02,57.91 v9.91,57.91
  Bottom 1.016: IC2.13 24.07,55.55 23.24,56.39 23.24,57.53 22.23,58.55 17.65,58.55 v17.02,57.91 | D12.A D16.C | D12.A 7.32,57.87 7.28,57.91 6.48,57.91 5.71,57.15 v5.71,53.59 | v9.91,57.91 7.9,57.91 D12.A
MOT42  (via drill 0.4, 0.6)
  Top 1.016: IC2.14 18.09,56.83 17.53,56.26 17.53,52.7 16.89,52.07 v13.84,52.07 | X6.2 2.31,37.37 4.19,39.24 4.19,50.93 5.21,51.94 v10.03,51.94
  Bottom 1.016: D17.C D13.A 11.91,55.12 | D17.C 10.1,52.01 v10.03,51.94 | D17.C 12.26,52.01 12.32,52.07 v13.84,52.07
N$1
  Bottom 0.254: R62.1 67.35,39.07 66.8,39.62 66.8,43.69 67.33,44.22 U2.2 70.26,44.2 71.5,44.2 71.75,44.45 71.75,45.21 72.01,45.47 74.68,45.47 arc-90 74.93,45.21 arc90 75.29,44.86 U2.22
N$2
  Bottom 0.254: U3.2 80.67,60.3 arc90 81.03,59.94 | 81.03,59.94 arc-90 81.31,59.66 U3.22 | R63.1 arc-90 78.74,59.94 81.03,59.94
N$3
  Bottom 0.813: F1.2 74.21,34.61 U$2.+5V
N$4
  Bottom 0.508: U$3.1 65.37,24.29 arc-90 65.02,24.64 arc90 64.8,24.86 T1.3
  Bottom 0.61: C8.1 61.17,24.76 T1.3
  Bottom 0.813: C8.1 58.95,27.84 F1.1
N$5
  Top 1.016: X1.1 91.55,62.85 F3.1
N$6
  Bottom 0.305: R4.2 65.85,25.76 U$3.3 65.79,25.81 T1.1
N$8
  Bottom 0.305: U$3.2 U$3.5 | U$3.6 U$3.5 | R3.2 71.94,25.21 71.68,24.94 U$3.5
N$10
  Top 1.016: F2.2 81.33,60.63 80.52,59.82 76.33,59.82 74.3,57.78 U$4.+5V
N$21
  Bottom 0.61: T14.1 15.47,64.78 R48.2 15.59,64.77 17.02,64.77 17.38,64.41 R49.1
N$24
  Bottom 0.61: X7.1 10.66,63.34 T14.3
N$28
  Bottom 0.254: U1.6 85.48,37.48 84.8,36.8 79.82,36.8 Q2.1 79.78,36.8 C28.2
N$29
  Bottom 0.254: U1.5 85.98,37.42 86.6,36.8 89.43,36.8 Q2.2 89.42,36.79 C27.2
NRST  (via drill 0.4)
  Top 0.254: v84.07,6.99 v84.07,15.24 | v84.07,20.07 89.92,20.07 90.42,20.57 90.42,39 89.35,40.07 v88.52,40.07 | v88.52,40.07 | v84.65,38.14 86.59,38.14 v88.52,40.07
  Bottom 0.254: SV1.12 80.24,2.26 80.9,2.92 80.9,6.6 81.15,6.86 83.95,6.86 v84.07,6.99 | v84.07,15.24 v84.07,20.07 | v88.52,40.07 R1.1 | U1.7 84.98,38.47 v84.65,38.14
RPI_CLK  (via drill 0.4)
  Top 0.254: v95.25,44.96 v95.25,49.4 | SV1.23 64.36,5.75 64.14,5.97 41.15,5.97 40.89,6.22 40.89,44.32 v41.27,44.7
  Bottom 0.254: v95.25,44.96 95.25,44.07 95,43.81 95,11.3 93.6,9.91 65.15,9.91 64.36,9.11 SV1.23 | U1.39 95.22,49.31 v95.25,49.4 | v41.27,44.7 41.27,45.09 39.37,46.99 37.21,46.99 36.2,48.01 36.2,56.9 35.69,57.4 31.37,57.4 30.99,57.78 30.99,61.72 32.64,63.37 X2.7
RPI_MISO  (via drill 0.4)
  Top 0.254: v96.01,44.07 v96.01,48.64 | SV1.21 66.9,5.87 66.29,6.48 41.66,6.48 41.4,6.73 41.4,43.56 v42.55,44.7
  Bottom 0.254: v96.01,44.07 95.5,43.56 95.5,10.92 93.98,9.4 67.18,9.4 66.9,9.11 SV1.21 | U1.40 94.58,48.81 94.74,48.64 v96.01,48.64 | v42.55,44.7 39.75,47.5 37.47,47.5 36.7,48.26 36.7,57.15 35.94,57.91 31.75,57.91 31.5,58.17 31.5,61.47 32.26,62.23 34.8,62.23 X2.5
RPI_MOSI  (via drill 0.4)
  Top 0.254: v96.39,43.05 96.77,43.43 v96.77,47.88 | SV1.19 69.44,6 68.45,6.99 42.16,6.99 41.91,7.24 41.91,42.93 v43.69,44.7
  Bottom 0.254: v96.39,43.05 96.01,42.67 96.01,10.54 94.36,8.89 69.72,8.89 69.44,8.61 SV1.19 | v96.77,47.88 94.74,47.88 94.31,48.31 U1.41 | X2.6 35.94,58.67 37.21,57.4 37.21,48.51 37.72,48.01 40.39,48.01 v43.69,44.7
RPI_RXD
  Bottom 0.254: SV1.10 82.14,1.68 82.68,1.14 93.85,1.14 95.12,2.41 95.12,6.99 97.54,9.4 97.54,40.64 98.42,41.53 98.42,45.21 97.41,46.23 95.03,46.23 93.45,47.81 U1.42
RPI_TXD
  Bottom 0.254: SV1.8 85.98,3.56 85.98,7.62 86.23,7.87 95.12,7.87 97.03,9.78 97.03,41.02 97.79,41.78 97.79,44.96 97.03,45.72 94.74,45.72 93.15,47.31 U1.43
SCL  (via drill 0.4)
  Top 0.254: v94.26,40.01 94.26,40.23 93.22,41.27 93.22,44.32 93.73,44.83 v93.73,51.31 | SV1.5 87.22,11.27 v87.25,11.3
  Bottom 0.254: 87.12,10.41 62.1,10.41 61.59,9.91 61.59,8.76 61.34,8.51 57.71,8.51 R60.1 | 87.12,10.41 93.22,10.41 94.49,11.68 94.49,39.78 v94.26,40.01 | v93.73,51.31 93.73,52.58 92.96,53.34 88.14,53.34 87.48,52.68 U1.35 | v87.25,11.3 87.25,10.54 87.12,10.41
SCL_TX  (via drill 0.4)
  Top 0.254: v82.68,46.23 75.18,46.23 74.93,45.97 73.91,45.97 73.74,46.15 v73.74,46.22 | X4.5 57.53,63.37 58.04,62.87 58.04,59.94 58.8,59.18 66.67,59.18 70.1,55.75 70.1,54.86 71.37,53.59 71.37,48.77 71.6,48.54 v71.6,46.23
  Bottom 0.254: U1.21 82.26,48.81 82.68,48.39 v82.68,46.23 | v71.6,46.23 73.73,46.23 v73.74,46.22
SDA  (via drill 0.4)
  Top 0.254: SV1.3 89.76,12.03 v89.79,12.06 | v93.75,38.99 93.75,39.34 92.71,40.39 92.71,44.58 93.22,45.09 93.22,50.04 92.71,50.55 v92.71,51.31
  Bottom 0.254: v92.71,51.31 92.71,52.32 92.2,52.83 88.39,52.83 87.98,52.42 U1.36 | v93.75,38.99 93.98,38.77 93.98,12.19 92.71,10.92 89.79,10.92 v89.79,12.06 89.53,12.32 59.6,12.32 R59.1
SDA_RX  (via drill 0.4)
  Top 0.254: v83.69,47.37 82.93,47.37 82.68,47.12 74.8,47.12 v74.55,46.86 | v72.14,49.78 72.14,53.59 70.61,55.12 70.61,56.01 66.93,59.69 59.69,59.69 59.31,60.07 X4.4
  Bottom 0.254: U1.22 83.53,49.31 83.82,49.02 83.82,47.5 v83.69,47.37 | v72.14,49.78 72.52,49.78 72.9,49.4 72.9,47.12 73.03,46.99 74.42,46.99 v74.55,46.86
SEN1  (via drill 0.4)
  Top 0.254: 81.03,41.66 v81.28,41.66 v63.75,41.66
  Bottom 0.254: U1.10 83.48,42.35 82.86,41.73 81.36,41.73 v81.28,41.66 | v63.75,41.66 62.23,43.18 55.88,43.18 55.37,42.67 55.37,39.5 55.63,39.24 55.63,38.35 53.59,36.32 53.59,26.92 47.88,21.21 35.94,21.21 30.61,15.88 29.03,15.88 C11.1
  Bottom 0.305: IC1.1 25.99,15.83 C11.1
  Bottom 1.422: R6.1 25.94,11.75 IC1.1
SEN2  (via drill 0.4)
  Top 0.254: v47.24,38.35 54.61,38.35 54.86,38.61 v54.86,38.86 | v63.75,42.93 64.52,42.16 80.52,42.16 v81.28,42.93
  Top 1.422: IC1.15 25.14,34.35 R5.1
  Bottom 0.254: IC1.15 27.41,33.56 C12.1 28.49,35.35 29.21,36.07 32,36.07 32.89,36.96 32.89,39.5 33.78,40.39 36.32,40.39 36.83,39.88 36.83,38.1 37.34,37.59 46.99,37.59 47.24,37.85 v47.24,38.35 | v54.86,38.86 54.86,43.18 55.47,43.79 62.43,43.79 63.3,42.93 v63.75,42.93 | U1.11 82.98,42.52 82.8,42.34 81.79,42.34 v81.28,42.93
SEN3  (via drill 0.4)
  Top 0.254: 25.73,40.31 27.3,38.73 v27.3,36.45 | v46.23,38.35 46.23,38.86 46.48,39.12 v53.85,39.12 | v63.37,43.94 64.01,43.94 65.28,42.67 79.92,42.67 81.19,43.94 v81.28,43.94
  Top 0.305: IC2.1 25.73,40.31
  Top 1.422: IC2.1 28.26,40.31 29.22,41.28 R7.1
  Bottom 0.254: v27.3,36.45 27.81,36.45 27.94,36.58 31.75,36.58 32.38,37.21 32.38,39.75 33.53,40.89 36.58,40.89 37.34,40.13 37.34,38.35 37.59,38.1 45.97,38.1 | v53.85,39.12 53.85,43.48 54.74,44.37 63.2,44.37 63.37,44.2 v63.37,43.94 | v81.28,43.94 81.84,43.94 U1.12 | IC2.1 27.81,40.31 C13.1
  Bottom 0.305: 45.97,38.1 v46.23,38.35
SEN4  (via drill 0.4)
  Top 0.254: v64.01,50.8 64.01,44.7 65.53,43.18 79.25,43.18 v80.01,43.94 | IC2.15 25.82,57.96 28.57,57.96 29.21,57.32 29.21,55.24 29.59,54.86 31.37,54.86 33.15,53.09 36.32,53.09 v38.23,54.99
  Top 1.422: IC2.15 24.71,58.09 23.11,59.69 11.14,59.69 R8.1
  Bottom 0.254: v64.01,50.8 64.01,55.12 62.99,56.13 38.35,56.13 37.97,55.75 37.97,55.24 v38.23,54.99 | v80.01,43.94 80.11,43.94 U1.13 | C14.1 25.8,57.98 IC2.15
SERVO1
  Bottom 0.254: U3.7 83.92,65.43 83.57,65.79 58.93,65.79 58.04,64.9 58.04,62.1 X4.6
SERVO1_UC
  Bottom 0.254: U1.29 84.48,55.8 84.56,55.88 U3.17
SERVO2
  Bottom 0.254: U3.8 84.58,62.7 84.58,65.79 84.07,66.29 55.88,66.29 54.23,64.64 X4.7
SERVO2_UC
  Bottom 0.254: U1.30 84.98,55.56 85.22,55.8 U3.16 | U3.16
SERVO3
  Bottom 0.254: U3.9 85.22,66.16 84.58,66.8 54.48,66.8 52.96,65.28 52.96,61.47 53.59,60.83 X4.8
SERVO3_UC
  Bottom 0.254: U1.31 85.48,55.34 85.88,55.74 U3.15
SPI1_NSS  (via drill 0.4)
  Top 0.254: v97.28,49.78 97.54,49.53 97.54,42.67 v97.03,42.16
  Bottom 0.254: SV1.24 64.36,3.02 64.9,3.56 73.27,3.56 SV1.15 74.52,8.1 74.8,8.38 94.74,8.38 96.52,10.16 96.52,41.66 v97.03,42.16 | v97.28,49.78 96.9,50.16 94.87,50.16 94.61,49.91 | U1.38 94.51,49.81 94.61,49.91 | R61.1 93.38,55.09 94.61,53.85 94.61,49.91
SWCLK  (via drill 0.4)
  Top 0.254: v91.19,50.8 91.19,51.94 92.33,53.09 97.28,53.09 98.04,52.32 98.04,42.04 95.76,39.75 95.76,28.96 94.61,27.81 92.33,27.81 91.95,27.43 91.95,19.68 91.57,19.3 v83.31,19.3 | v62.74,14.1 v62.74,9.59
  Bottom 0.254: U1.37 90.69,50.31 v91.19,50.8 | v83.31,19.3 83.31,15.88 82.42,14.99 78.74,14.99 77.34,13.59 63.25,13.59 v62.74,14.1 | v62.74,9.59 62.74,6.35 63.12,5.97 63.12,1.27 63.25,1.14 66.55,1.14 66.93,1.52 66.93,2.23 SV1.22
SWDIO  (via drill 0.4)
  Top 0.254: v82.17,18.92 82.55,18.54 91.82,18.54 92.46,19.18 92.46,27.18 92.58,27.3 94.87,27.3 96.27,28.7 96.27,39.5 98.55,41.78 98.55,52.7 97.16,54.1 v93.09,54.1 | v77.47,14.99 77.47,8.89 v75.95,7.37
  Bottom 0.254: U1.34 86.98,53.07 87.76,53.85 92.84,53.85 v93.09,54.1 | v82.17,18.92 82.17,16.13 81.66,15.62 78.11,15.62 v77.47,14.99 | v75.95,7.37 75.82,7.24 75.82,1.52 75.44,1.14 72.14,1.14 72.01,1.27 72.01,2.23 SV1.18
VCC  (via drill 0.4, 0.6)
  Top 0.61: v1.91,54.86 v10.03,54.86
  Top 1.016: v22.48,11.81 22.48,3.17 22.35,3.05 11.07,3.05 C5.+ | v13.72,6.1 13.72,3.34 13.97,3.08 | v10.03,54.86 11.43,54.86 11.81,54.48 11.81,48.39 14.1,46.1 v15.24,46.1
  Top 2.184: X3.2 4.79,3.08 C5.+ 13.97,3.08 37.97,3.08 | 37.97,3.08 38.13,3.08 | v39.37,43.05 39.37,34.67 | 39.37,34.67 39.37,4.48 37.97,3.08 | 39.37,34.67 39.24,34.54 34.6,34.54 U$2.IN+
  Bottom 0.254: R45.2 39.78,42.65 v39.37,43.05
  Bottom 0.406: 28.2,38.15 28.02,38.15 27.94,38.23
  Bottom 0.61: D12.C 10.35,56.26 9.27,56.26 8.08,55.07 D13.C 9.83,55.07 v10.03,54.86 | X7.2 1.97,59.81 C6.1 1.91,56.45 v1.91,54.86
  Bottom 1.016: IC1.4 20.91,19.64 22.98,19.64 23.38,19.24 23.38,15.44 22.46,14.53 C16.1 22.46,11.82 v22.48,11.81 | 23.5,38.23 23.14,38.58 23.14,38.99 | 23.14,38.99 23.14,43.28 22.3,44.12 IC2.4 19.38,44.12 17.4,46.1 v15.24,46.1 | C17.1 21.63,38.99 22.99,38.99 | 22.99,38.99 23.14,38.99 | v15.24,46.1 12.01,46.1 D10.C | 22.99,38.99 23.11,38.86 23.11,35.18 22.3,34.37 D4.C D5.C | D2.C 12,22.61 13.59,22.61 14.35,21.84 14.35,17.4 13.65,16.7 D3.C 12.21,7.6 v13.72,6.1 | D11.C 13.94,40.36 15.24,41.66 v15.24,46.1
  Bottom 1.422: 23.5,38.23 27.94,38.23 33.02,42.42 34.8,44.2 34.8,45.34 | 34.8,55.66 U$4.IN+
  Bottom 1.93: 39.37,44.45 39.37,44.58 | 38.86,45.21 38.61,45.47 34.92,45.47 34.8,45.34 34.59,45.55 U$4.IN+
  Bottom 2.184: 39.37,44.58 39.37,44.7 38.86,45.21 | v39.37,43.05 39.37,44.45

## Text on the board
tNames: secondary / power supply | 7V | M41 | M42 | M31 | M32 | M21 | 5V | M22 | M11 | M12 | GND | VCC
bNames: CLK | VCC | MISO | DATA- | GND | TIM2 | SCL/TX | +5V | +7V/1 | GND | MOSI | DATA+ | +5V | GND | TIM3 | TIM1 | SDA/RX | +7V/2 | STM32F030C8T6